# Altium PCB Pec.PcbDoc (part 1 of 2)
Units mm, origin at the board's own origin, x right, y up, seen from the top; angles counter-clockwise.
Board outline 94.11 x 61.04 mm, 2 copper layers (Top Layer, Bottom Layer); 131 components, 81 nets, 370 pads, 218 vias.
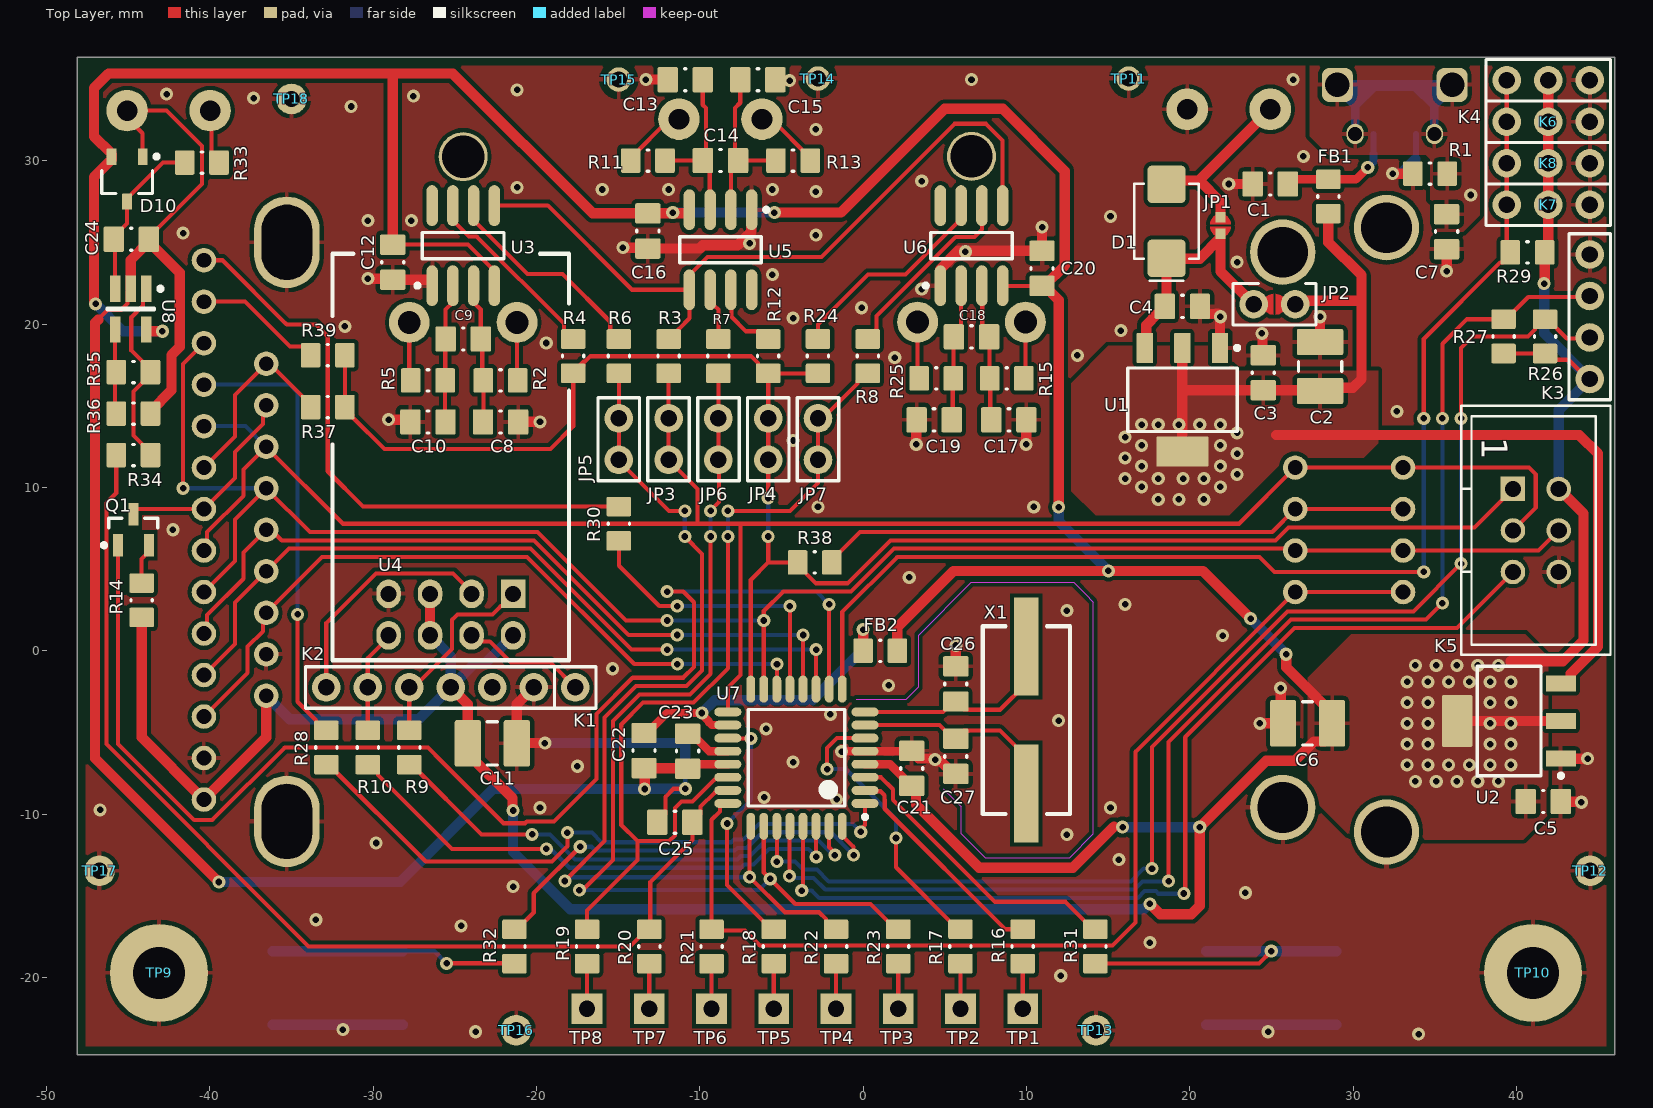
[diagram p0: Top Layer view]
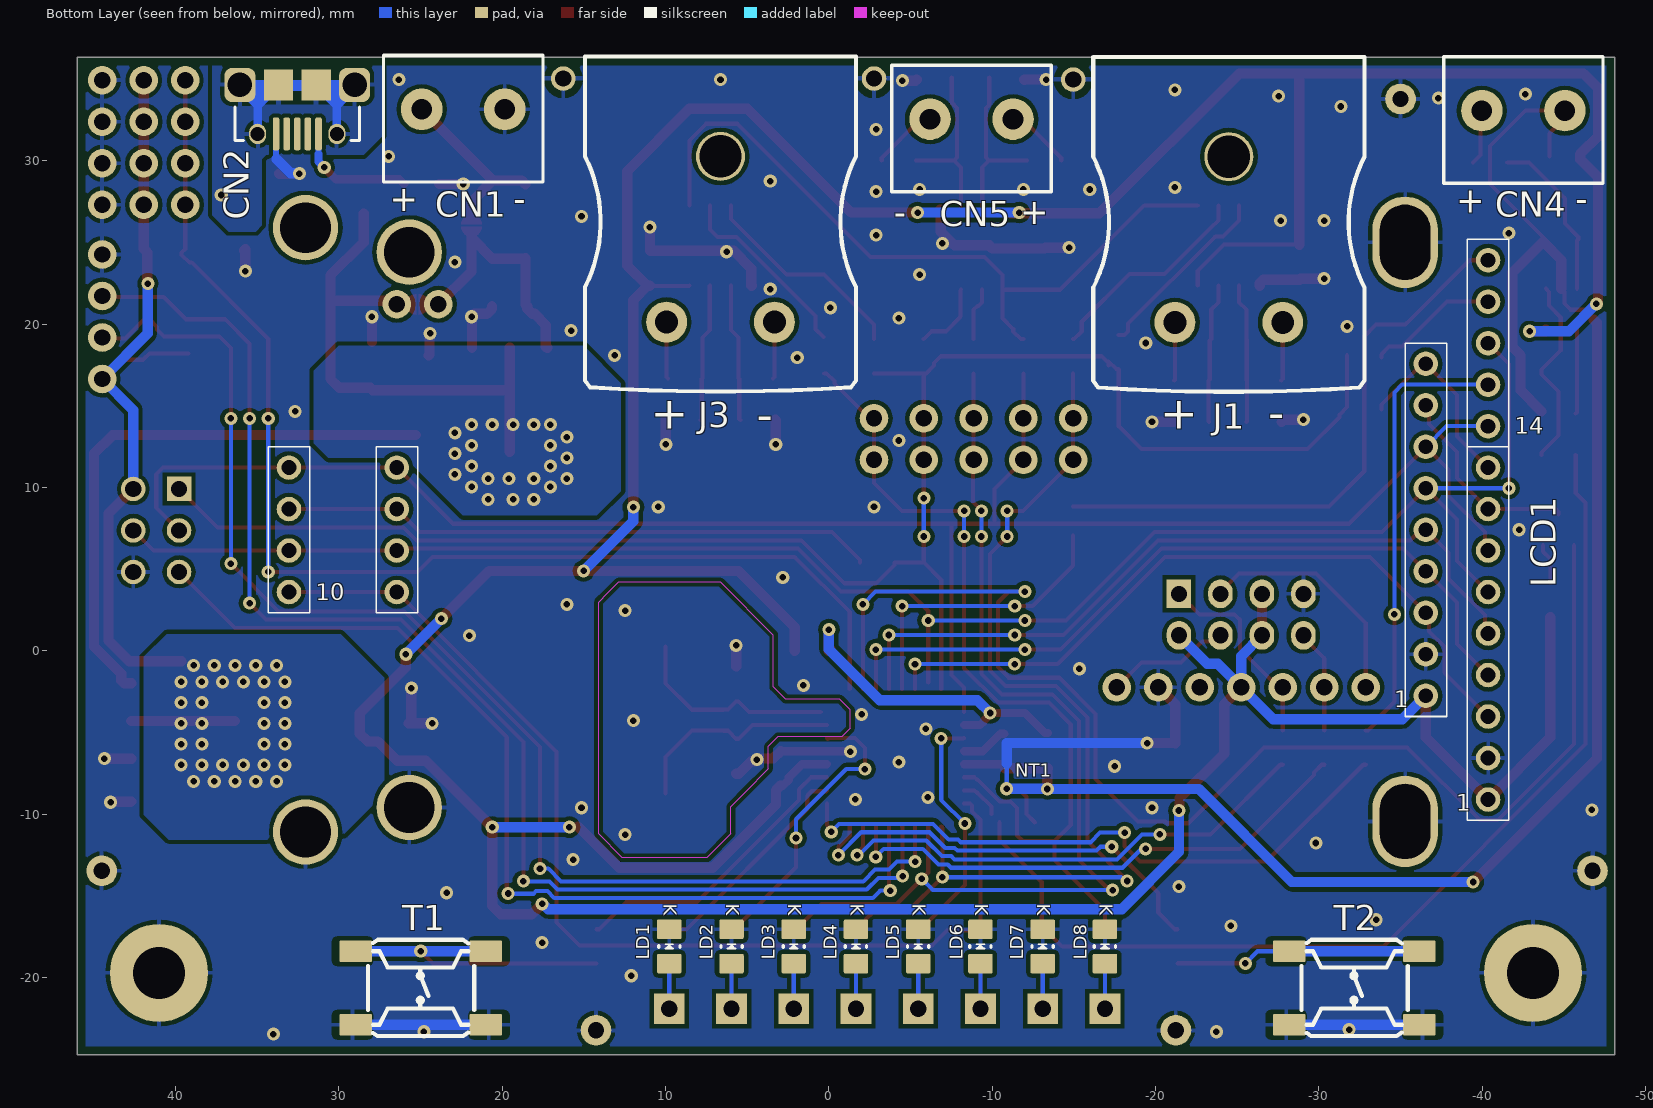
[diagram p1: Bottom Layer view, seen from below]

## Layer stack, top to bottom
Top Solder: solder mask 0.0102, Solder Resist, Dk 3.5
Top Layer: signal copper 0.0356
Dielectric 1: dielectric 0.32, FR-4, Dk 4.8
Bottom Layer: signal copper 0.0356
Bottom Solder: solder mask 0.0102, Solder Resist, Dk 3.5

## Board outline
-48.099,-24.721 -48.099,36.322 46.008,36.322 46.008,-24.721

## Design rules (kind name [scope] priority, off if disabled: settings)
BoardOutlineClearance [All] p1: gap=0.508 ignorepadtopadclearanceinfootprint=FALSE
Clearance Clearance_uUSB [InComponent('CN2') vs InComponent('CN2')] p1: gap=0.203 ignorepadtopadclearanceinfootprint=FALSE
Clearance Clearance_JP1 [InComponent('JP1') vs InComponent('JP1')] p2: gap=0.152 ignorepadtopadclearanceinfootprint=FALSE
Clearance Clearance_JP2 [InComponent('JP2') vs InComponent('JP2')] p3: gap=0.152 ignorepadtopadclearanceinfootprint=FALSE
Clearance [All] p4: gap=0.254 ignorepadtopadclearanceinfootprint=FALSE
ComponentClearance CompClearance_ESPcon [InComponent('K1') vs InComponent('K2')] p1: gap=0 collisioncheckmode=3 verticalgap=0 showdistances=FALSE
ComponentClearance CompClearance_DBcon [InComponent('K4') or InComponent('K6') or InComponent('K7') or InComponent('K8') vs InComponent('K4') or InComponent('K6') or InComponent('K7') or InComponent('K8')] p2: gap=0 collisioncheckmode=3 verticalgap=0 showdistances=FALSE
ComponentClearance CompClearance_PWR [(Identifier = 'User Library-Cliff FC68149 DC PCB Socket') vs InComponent('CN3')] p3: gap=0 collisioncheckmode=3 verticalgap=0 showdistances=FALSE
ComponentClearance [All] p4: gap=0.254 collisioncheckmode=3 verticalgap=0.254 showdistances=FALSE
HoleSize [All] p1: absolutevalues=TRUE maxlimit=6 minlimit=0.025 maxpercent=80.000 minpercent=20.000
HoleToHoleClearance [All] p1: gap=0.203 allowstackedmicrovias=TRUE
MinimumSolderMaskSliver [All] p1: minsoldermaskwidth=0
PolygonConnect [All] p1: thpad.connectstyle=Relief thpad.reliefconductorwidth=0.254 thpad.reliefentries=4 thpad.polygonreliefangle="90 Angle" thpad.airgapwidth=0.254 smdpad.connectstyle=Relief smdpad.reliefconductorwidth=0.254 smdpad.reliefentries=4 smdpad.polygonreliefangle="90 Angle" smdpad.airgapwidth=0.254 via.connectstyle=Direct via.reliefconductorwidth=0.254 via.reliefentries=4 via.polygonreliefangle="90 Angle" via.airgapwidth=0.254
RoutingVias [All] p1: holewidth=0.4 width=0.8 viastyle="Through Hole" minholewidth=0.4 minwidth=0.8 maxholewidth=0.4 maxwidth=0.8
SilkToSilkClearance [All] p1: silktosilkclearance=0.152
SilkToSolderMaskClearance [IsPad] p1: minsilkscreentomaskgap=0.102 clearancetoexposedcopper=TRUE
SolderMaskExpansion [All] p1: expansion=0.102 istentingtop=FALSE
Width [All] p1: maxlimit=1.27 minlimit=0.254 preferedwidth=0.254
24 further rules are at their usual default settings.

## Components (designator, comment, footprint, x,y, rotation, side; value= is the part's Value field where it differs from the comment)
C1 "10n" C2012_0805I_M 24.926,28.575 r180 top
C2 "10u" C3225_1210I_M 27.974,17.399 r90 top
C3 "100n" C2012_0805I_M 24.501,17.018 r90 top
C4 "100n" C2012_0805I_M 19.548,21.082 r0 top
C5 "100n" C2012_0805I_M 41.639,-9.227 r0 top
C6 "10u" C3225_1210I_M 27.212,-4.445 r180 top
C7 "4n7" C2012_0805I_M 35.721,25.654 r90 top
C8 "NP" C2012_0805I_M -22.191,14.007 r180 top
C9 "10n" C2012_0805I_M -24.479,19.087 r180 top
C10 "NP" C2012_0805I_M -26.636,14.007 r180 top
C11 "10u" C3225_1210I_M -22.699,-5.671 r0 top
C12 "100n" C2012_0805I_M -28.795,23.786 r90 top
C13 "NP" C2012_0805I_M -10.888,34.955 r0 top
C14 "10n" C2012_0805I_M -8.729,30.009 r0 top
C15 "NP" C2012_0805I_M -6.443,34.955 r0 top
C16 "100n" C2012_0805I_M -13.174,25.698 r90 top
C17 "NP" C2012_0805I_M 8.924,14.134 r180 top
C18 "10n" C2012_0805I_M 6.638,19.214 r180 top
C19 "NP" C2012_0805I_M 4.352,14.134 r180 top
C20 "100n" C2012_0805I_M 10.956,23.412 r270 top
C21 "100n" C2012_0805I_M 2.98,-7.195 r90 top
C22 "100n" C2012_0805I_M -13.409,-6.107 r270 top
C23 "100n" C2012_0805I_M -10.742,-6.147 r270 top
C24 "10n" C2012_0805I_M -44.797,25.19 r0 top
C25 "10n" C2012_0805I_M -11.523,-10.497 r180 top
C26 "18p" C2012_0805I_M 5.679,-2.029 r90 top
C27 "18p" C2012_0805I_M 5.679,-6.465 r270 top
CN1 "VRSTNA SPONKA 2P/16A" "VRSTNA SPONKA 2P/16A" 24.926,33.147 r180 bottom
CN2 "microUSB" micro-USB-HRS-ZX62D-B-5PA8 32.546,32.639 r90 bottom
CN4 "VRSTNA SPONKA 2P/16A" "VRSTNA SPONKA 2P/16A" -39.971,33.064 r180 bottom
CN5 "VRSTNA SPONKA 2P/16A" "VRSTNA SPONKA 2P/16A" -6.189,32.542 r180 bottom
D1 "SS26" DO-214AA_SMB_M 18.576,26.289 r90 top
D10 "DB3X313F" SOT23 -45.051,28.873 r270 top
FB1 "FERITTE BEAD" R2012_0805I_M 28.482,27.813 r270 top
FB2 "FERITTE BEAD" R2012_0805I_M 1.05,0 r180 top
J1 "IM-K-PCB" IM-x-PCB -24.479,30.244 r180 bottom
J3 "IM-K-PCB" IM-x-PCB 6.638,30.263 r180 bottom
JP1 "JMP" solderJumper 21.878,26.035 r270 top value={Value}
JP2 "JMP" H1x2+solderJumper 26.45,21.209 r0 top value={Value}
JP3 "JMP" H1x2 -11.904,14.224 r90 top value={Value}
JP4 "JMP" H1x2 -5.808,14.224 r90 top value={Value}
JP5 "JMP" H1x2 -14.952,14.224 r90 top value={Value}
JP6 "JMP" H1x2 -8.856,14.224 r90 top value={Value}
JP7 "JMP" H1x2 -2.76,14.224 r90 top value={Value}
K1 "H1x1" H1x1 -17.619,-2.242 r270 top
K2 "H1x6" H1x6 -20.159,-2.242 r0 top
K3 "H1x4" H1x4 44.484,24.257 r90 top
K4 "H1x3" H1x3 39.404,34.925 r180 top
K5 "H2x3" H2X3_SPEEDY 39.785,9.906 r270 top
K6 "H1x3" H1x3 39.404,32.385 r180 top
K7 "H1x3" H1x3 39.404,27.305 r180 top
K8 "H1x3" H1x3 39.404,29.845 r180 top
LCD1 "Color LCD display" LCD_display -3.522,7.403 r0 bottom locked
LD1 "LED" LED2012_0805I_M 9.773,-18.102 r270 bottom
LD2 "LED" LED2012_0805I_M 5.963,-18.102 r270 bottom
LD3 "LED" LED2012_0805I_M 2.153,-18.102 r270 bottom
LD4 "LED" LED2012_0805I_M -1.657,-18.102 r270 bottom
LD5 "LED" LED2012_0805I_M -5.467,-18.102 r270 bottom
LD6 "LED" LED2012_0805I_M -9.277,-18.102 r270 bottom
LD7 "LED" LED2012_0805I_M -13.087,-18.102 r270 bottom
LD8 "LED" LED2012_0805I_M -16.897,-18.102 r270 bottom
NT1 "NetTie" NetTie-10mil -10.888,-7.83 r270 bottom net-tie
Q1 "PMV160UP" NXP-SOT23_N -44.67,7.41 r90 top
R1 "10M" R2012_0805I_M 34.705,29.21 r180 top
R2 "100" R2012_0805I_M -22.191,16.547 r180 top
R3 "10k" R2012_0805I_M -11.904,18.034 r270 top
R4 "10k" R2012_0805I_M -17.746,18.034 r270 top
R5 "100" R2012_0805I_M -26.636,16.547 r0 top
R6 "10k" R2012_0805I_M -14.952,18.034 r270 top
R7 "10k" R2012_0805I_M -8.856,18.034 r270 top
R8 "10k" R2012_0805I_M 0.288,18.034 r270 top
R9 "1k" R2012_0805I_M -27.779,-5.925 r90 top
R10 "1k" R2012_0805I_M -30.319,-5.925 r90 top
R11 "100" R2012_0805I_M -13.174,30.009 r0 top
R12 "10k" R2012_0805I_M -5.808,18.034 r270 top
R13 "100" R2012_0805I_M -4.284,30.009 r180 top
R14 "10" R2012_0805I_M -44.162,3.092 r270 top
R15 "100" R2012_0805I_M 8.797,16.674 r180 top
R16 "330" R2012_0805I_M 9.773,-18.102 r270 top
R17 "330" R2012_0805I_M 5.963,-18.102 r270 top
R18 "330" R2012_0805I_M -5.467,-18.102 r270 top
R19 "330" R2012_0805I_M -16.897,-18.102 r270 top
R20 "330" R2012_0805I_M -13.087,-18.102 r270 top
R21 "330" R2012_0805I_M -9.277,-18.102 r270 top
R22 "330" R2012_0805I_M -1.657,-18.102 r270 top
R23 "330" R2012_0805I_M 2.153,-18.102 r270 top
R24 "10k" R2012_0805I_M -2.76,18.034 r270 top
R25 "100" R2012_0805I_M 4.479,16.674 r0 top
R26 "10k" R2012_0805I_M 41.747,19.248 r270 top
R27 "10k" R2012_0805I_M 39.207,19.248 r270 top
R28 "1k" R2012_0805I_M -32.859,-5.925 r90 top
R29 "4k7" R2012_0805I_M 40.674,24.384 r0 top
R30 "4k7" R2012_0805I_M -14.952,7.777 r90 top
R31 "1k" R2012_0805I_M 14.218,-18.102 r90 top
R32 "1k" R2012_0805I_M -21.342,-18.102 r270 top
R33 "10k" R2012_0805I_M -40.479,29.889 r180 top
R34 "10k" R2012_0805I_M -44.67,11.982 r180 top
R35 "100k" R2012_0805I_M -44.67,17.062 r0 top
R36 "10k" R2012_0805I_M -44.67,14.522 r180 top
R37 "1k" R2012_0805I_M -32.772,14.918 r180 top
R38 "1k" R2012_0805I_M -2.957,5.405 r0 top
R39 "1k" R2012_0805I_M -32.772,18.093 r180 top
T1 "Tipka_6x6" "Tipka 6x6" 25.013,-20.642 r270 bottom (schematic designator A1)
T2 "Tipka_6x6" "Tipka 6x6" -32.137,-20.642 r270 bottom (schematic designator A2)
TP1 "PAD" PAD_HOLE 9.773,-21.912 r90 top
TP2 "PAD" PAD_HOLE 5.963,-21.912 r90 top
TP3 "PAD" PAD_HOLE 2.153,-21.912 r90 top
TP4 "PAD" PAD_HOLE -1.657,-21.912 r90 top
TP5 "PAD" PAD_HOLE -5.467,-21.912 r90 top
TP6 "PAD" PAD_HOLE -9.277,-21.912 r90 top
TP7 "PAD" PAD_HOLE -13.087,-21.912 r90 top
TP8 "PAD" PAD_HOLE -16.897,-21.912 r90 top
TP9 "PAD" PAD_CIRC_HOLE#1 -43.099,-19.721 r90 top
TP10 "PAD" PAD_CIRC_HOLE#1 41.008,-19.721 r90 top
TP11 "PAD" PAD_CIRC_HOLE#2 16.258,35.029 r90 top
TP12 "PAD" PAD_CIRC_HOLE#3 44.508,-13.471 r90 top
TP13 "PAD" PAD_CIRC_HOLE#3 14.258,-23.221 r90 top
TP14 "PAD" PAD_CIRC_HOLE#2 -2.76,35.029 r90 top
TP15 "PAD" PAD_CIRC_HOLE#2 -14.952,34.969 r90 top
TP16 "PAD" PAD_CIRC_HOLE#3 -21.242,-23.221 r90 top
TP17 "PAD" PAD_CIRC_HOLE#3 -46.742,-13.471 r90 top
TP18 "PAD" PAD_CIRC_HOLE#3 -34.992,33.779 r90 top
U1 "REG1117-5" TI-DCY4_N 19.548,15.367 r270 top
U2 "REG1117-3.3" TI-DCY4_N 39.543,-4.3 r180 top
U3 "MAX31855KASA+" MAXM-S8+4_M -24.479,24.802 r90 top
U4 "ESP-01" ESP01 -21.429,3.48 r270 top
U5 "MAX31855KASA+" MAXM-S8+4_M -8.729,24.548 r270 top
U6 "MAX31855KASA+" MAXM-S8+4_M 6.638,24.802 r90 top
U7 "ATmega328PB-AU" 32A_N -4.079,-6.547 r180 top
U8 "LT6003CS5" LT-S5-5-TSOT-23_M -44.84,20.911 r270 top
X1 "16MHz" Crystal_HC49 9.997,0.253 r270 top

## Footprints (in the part's own frame and the unit in brackets; to place one, negate y for a bottom-side part, rotate by r counter-clockwise, add the part's x,y. Pads: shape width x height; smd on the part's side, far side on the other; paste and mask are expansions set on the pad)
32A_N [mm]
  oval 1.65x0.54 smd mask+0.08: 1(-4.2,2.8) 2(-4.2,2) 3(-4.2,1.2) 4(-4.2,0.4) 5(-4.2,-0.4) 6(-4.2,-1.2) 7(-4.2,-2) 8(-4.2,-2.8) 17(4.2,-2.8) 18(4.2,-2) 19(4.2,-1.2) 20(4.2,-0.4) 21(4.2,0.4) 22(4.2,1.2) 23(4.2,2) 24(4.2,2.8)
  oval 0.54x1.65 smd mask+0.08: 9(-2.8,-4.2) 10(-2,-4.2) 11(-1.2,-4.2) 12(-0.4,-4.2) 13(0.4,-4.2) 14(1.2,-4.2) 15(2,-4.2) 16(2.8,-4.2) 25(2.8,4.2) 26(2,4.2) 27(1.2,4.2) 28(0.4,4.2) 29(-0.4,4.2) 30(-1.2,4.2) 31(-2,4.2) 32(-2.8,4.2)
  silkscreen extent -4.33,-2.95 2.95,3.75, body extent -3.5,-3.5 3.5,3.5, height 1.2
C2012_0805I_M [mm] "Chip Capacitor, 2-Leads, Body 2.05x1.25mm, IPC Low Density"
  rrect15% 1.25x1.55 smd: 1(-1.075,0) 2(1.075,0)
  silkscreen extent -0.05,-0.67 0.05,0.67, body extent -1.1,-0.7 1.1,0.7, height 1.4
C3225_1210I_M [mm] "Chip Capacitor, 2-Leads, Body 3.20x2.50mm, IPC Low Density"
  rrect15% 1.6x2.85 smd: 1(-1.5,0) 2(1.5,0)
  silkscreen extent -0.3,-1.32 0.3,1.33, body extent -1.75,-1.38 1.75,1.38, height 2.8
Crystal_HC49 [mm] "Crystall SMD short HC49"
  rect 6x1.5 smd: 1(0,0) 2(8.999,0)
  silkscreen extent -1.25,-2.67 10.25,2.67, body extent -2.13,-2.41 11.27,2.49, height 5.08
DO-214AA_SMB_M [mm] "Diode, Molded Body; 5.40 mm L X 3.62 mm W X 2.44 mm H body"
  rrect22% 2.28x2.32 smd: A(2.265,0) C(-2.265,0)
  silkscreen extent -3.63,-1.97 2.29,1.97, body extent -2.7,-1.81 2.7,1.81, height 2.44
ESP01 [mm]
  rect 1.75x1.5 hole 1: 1(0,0)
  oval 1.75x1.5 hole 1: 2(2.54,0) 3(0,-2.54) 4(2.54,-2.54) 5(0,-5.08) 6(2.54,-5.08) 7(0,-7.62) 8(2.54,-7.62)
  silkscreen extent -20.83,-11.05 4.06,3.43, body extent -20.76,-11.06 4.04,3.44, height 11.69
H1x1 [mm]
  round 1.75 hole 1: 1(0,0)
  silkscreen extent -1.27,-1.27 1.27,1.27, body extent -1.27,-1.27 1.27,1.27, height 8.4
H1x2 [mm]
  round 1.75 hole 1: 1(0,0) 2(-2.54,0)
  silkscreen extent -3.81,-1.27 1.27,1.27, body extent -3.81,-1.27 1.27,1.27, height 8.4
H1x2+solderJumper [mm]
  round 1.75 hole 1: 1(0,0) 2(-2.54,0)
  Top Layer region: 0.381,0.635 -0.508,0.635 -0.762,0.381 -0.762,-0.381 -0.508,-0.635 0.381,-0.635 0.635,-0.381 0.635,0.381
  Top Layer region: -2.921,0.635 -2.032,0.635 -1.778,0.381 -1.778,-0.381 -2.032,-0.635 -2.921,-0.635 -3.175,-0.381 -3.175,0.381
  Top Layer region: -1.194,0.635 -0.882,0.546 -0.654,0.314 -0.571,0 -0.571,0 -0.654,-0.314 -0.882,-0.546 -1.194,-0.635 -1.194,-0.635
  Top Layer region: -1.346,0.635 -1.658,0.546 -1.886,0.314 -1.969,0 -1.969,0 -1.886,-0.314 -1.658,-0.546 -1.346,-0.635 -1.346,-0.635
  silkscreen extent -3.81,-1.27 1.27,1.27, body extent -3.81,-1.27 1.27,1.27, height 8.4
H1x3 [mm]
  round 1.75 hole 1: 1(0,0) 2(-2.54,0) 3(-5.08,0)
  silkscreen extent -6.35,-1.27 1.27,1.27, body extent -6.35,-1.27 1.27,1.27, height 8.4
H1x4 [mm]
  round 1.75 hole 1: 1(0,0) 2(-2.54,0) 3(-5.08,0) 4(-7.62,0)
  silkscreen extent -8.89,-1.27 1.27,1.27, body extent -8.89,-1.27 1.27,1.27, height 8.4
H1x6 [mm]
  round 1.75 hole 1: 1(0,0) 2(-2.54,0) 3(-5.08,0) 4(-7.62,0) 5(-10.16,0) 6(-12.7,0)
  silkscreen extent -13.97,-1.27 1.27,1.27, body extent -13.97,-1.27 1.27,1.27, height 8.4
H2X3_SPEEDY [mm]
  rect 1.5x1.5 hole 1: 1(0,0)
  round 1.5 hole 1: 2(0,2.794) 3(2.54,0) 4(2.54,2.794) 5(5.08,0) 6(5.08,2.794)
  silkscreen extent -5.08,-3.18 10.16,5.97, body extent -5.08,-3.18 10.16,6.03, height 9.45
IM-x-PCB [mm]
  round 3 hole 2.6: 0(0,0)
  round 2.5 hole 1.4: 1(-3.3,-10.141) 2(3.3,-10.141)
  silkscreen extent -8.3,-14.39 8.3,6.11, body extent -8.3,-14.39 8.3,6.11, height 8.57
LCD_display [mm]
  round 4 hole 3.1: 0(29.21,-17) 0(35.56,-18.5) M0(29.21,17) M0(35.56,18.5)
  round 1.5 hole 0.9: 1(-36.83,16.51) 1(-33.02,10.16) 2(-36.83,13.97) 2(-33.02,7.62) 3(-36.83,11.43) 3(-33.02,5.08) 4(-36.83,8.89) 4(-33.02,2.54) 5(-36.83,6.35) 5(-33.02,0) 6(-36.83,3.81) 6(-33.02,-2.54) 7(-36.83,1.27) 7(-33.02,-5.08) 8(-36.83,-1.27) 8(-33.02,-7.62) 9(-36.83,-3.81) 9(-33.02,-10.16) 10(29.972,3.81) 10(36.576,3.81) 11(29.972,1.27) 11(36.576,1.27) 12(29.972,-1.27) 12(36.576,-1.27) 13(29.972,-3.81) 13(36.576,-3.81) 14(-36.83,-6.35) 15(-36.83,-8.89) 16(-36.83,-11.43) 17(-36.83,-13.97) 18(-36.83,-16.51)
  oval 4x5.6 hole 3.1 slot 4.6 at 90 deg: M0(-31.75,-17.6) M0(-31.75,17.85)
  silkscreen extent -38.1,-17.78 37.85,17.78, body extent -33.75,-20 33.25,20, height 17.1
LED2012_0805I_M [mm] "SMD LED, 2-Leads, Body 2.05x1.25mm, IPC Low Density"
  rrect15% 1.2x1.5 smd: 1(-1.05,0) 2(1.05,0)
  silkscreen extent -0.13,-0.65 0.13,0.65, body extent -1,-0.62 1,0.63, height 0.7
LT-S5-5-TSOT-23_M [mm] "SOT23, 5-Leads, Body 2.90x1.63mm, Pitch 0.95mm, IPC Low Density"
  rect 1.6x0.65 smd: 1(-1.25,0.95) 2(-1.25,0) 3(-1.25,-0.95) 4(1.25,-0.95) 5(1.25,0.95)
  silkscreen extent -1.37,-1.45 0.05,1.95, body extent -0.87,-1.45 0.87,1.45, height 1
MAXM-S8+4_M [mm] "SOIC, 8-Leads, Body 4.9x3.9mm, Pitch 1.27mm, IPC Low Density"
  oval 2.5x0.7 smd: 1(-2.45,1.905) 2(-2.45,0.635) 3(-2.45,-0.635) 4(-2.45,-1.905) 5(2.45,-1.905) 6(2.45,-0.635) 7(2.45,0.635) 8(2.45,1.905)
  silkscreen extent -2.57,-2.5 0.8,2.93, body extent -2,-2.5 2,2.5, height 1.75
micro-USB-HRS-ZX62D-B-5PA8 [mm]
  rrect100% 1.25x1.05 hole 0.85: 0(-1,-2.425) 0(-1,2.425)
  rrect50% 2.1x1.9 hole 1.5: 0(2,-3.512) 0(2,3.512)
  rect 1.9x1.8 smd: 0(2,-1.15) 0(2,1.15)
  rrect50% 2x0.4 smd: 1(-1,-1.3) 2(-1,-0.65) 3(-1,0) 4(-1,0.65) 5(-1,1.3)
  Top Layer region: -1.016,-2.159 0.635,-2.159 1.651,-1.143 1.651,1.143 0.635,2.159 -1.016,2.159 -1.016,2.667 0.635,2.667 1.524,3.556 2.286,3.556 2.286,-3.556 1.524,-3.556 0.635,-2.667 -1.016,-2.667
  silkscreen extent -1.4,-3.81 0.64,3.81, body extent -1.11,-4.1 4.32,4.1, height 2.68
NetTie-10mil [mil]
  round 0.1 smd paste-39.37 mask+0: 1(-10,0) 2(10,0)
  Top Layer lines w10: 10,0 -10,0
NXP-SOT23_N [mm]
  rect 1.4x0.6 smd: 1(-0.95,0.95) 2(-0.95,-0.95) 3(0.95,0)
  silkscreen extent -1.07,-1.5 0.7,1.92, body extent -0.7,-1.5 0.7,1.5, height 1.1
PAD_CIRC_HOLE#1 [mm]
  round 6 hole 3.2: 1(0,0)
PAD_CIRC_HOLE#2 [mm]
  round 1.5 hole 1.001: 1(0,0)
PAD_CIRC_HOLE#3 [mm]
  round 1.88 hole 1.001: 1(0,0)
PAD_HOLE [mil]
  rect 74x74 hole 39.4: 1(0,0)
R2012_0805I_M [mm] "Chip Resistor, 2-Leads, Body 2.05x1.25mm, IPC Low Density"
  rrect15% 1.2x1.5 smd: 1(-1.05,0) 2(1.05,0)
  silkscreen extent -0.05,-0.65 0.05,0.65, body extent -1.1,-0.7 1.1,0.7, height 0.8
solderJumper [mil]
  rect 25x25 smd: 1(20,0) 2(-20,0)
  Top Layer region: 3,25 15.29,21.49 24.24,12.36 27.51,0 27.51,0 24.24,-12.36 15.29,-21.49 3,-25 3,-25
  Top Layer region: -3,25 -15.29,21.49 -24.24,12.36 -27.51,0 -27.51,0 -24.24,-12.36 -15.29,-21.49 -3,-25 -3,-25
SOT23 [mm]
  rrect10% 1x0.6 smd: 1(-1.375,0.95) 2(-1.375,-0.95) 3(1.375,0)
  silkscreen extent -1.5,-1.55 0.87,1.92, body extent -1.25,-1.5 1.25,1.5, height 1.05
TI-DCY4_N [mm]
  rrect10% 1.85x1 smd: 1(-3.175,2.3) 2(-3.175,0) 3(-3.175,-2.3)
  rrect10% 1.85x3.2 smd: 4(3.175,0)
  silkscreen extent -3.3,-3.35 1.95,3.48, body extent -1.85,-3.35 1.85,3.35, height 1.8
"Tipka 6x6" [mm]
  rrect10% 1.3x2 smd: 1(-2.25,-3.95) 2(-2.25,4) 3(2.25,-3.95) 4(2.25,4)
  silkscreen extent -2.95,-3.2 2.95,3.3, body extent -2.95,-4.07 3.05,4.08, height 5
"VRSTNA SPONKA 2P/16A" [mm]
  round 2.54 hole 1.27: 1(0,0) 2(5.08,0)
  silkscreen extent -2.34,-4.45 7.42,3.3, body extent -2.46,-4.57 7.54,3.43, height 10.01

## Part data
C1 C2 C3 C4 C5 C6 C7 C8 C9 C10 C11 C12 C13 C14 C15 C16 C17 C18 C19 C20 C21 C22 C23 C24 C25 C26 C27: library part C, "Capacitor"
CN2: library part "microUSB-B-socket (HIROSE ZX62D-B-5PA8)", "micro USB-B socket (HIROSE ZX62D-B-5PA8)", Supplier Part Number 1=2300438, ComponentLink1Description=http://www.farnell.com/datasheets/1693470.pdf, ComponentLink1URL=http://www.farnell.com/datasheets/1693470.pdf, Supplier 1=Farnell
D1: library part P6SMB6.8AT3, "P6SMB6.8AT3"
D10: "Schottky", Supplier Part Number 1=2459056, Supplier 1=Farnell
K1: "Header 1x1 (male)"
K2: "Header 1x6 (male)"
K3: "Header 1x4 (male)"
K4 K6 K7 K8: "Header 1x3 (male)"
K5: "Header 2x3 (male)"
LCD1: library part LCD_module, "2.2\" or 2.4\" LCD_module w/o Touch"
NT1: "Connetct different grounds together"
Q1: library part PMV160UP,215, "P-Channel Trench MOSFET, -20 V, -1.2 A, -55 to 150 degC, 3-Pin SOT23, Tape and Reel", Manufacturer="NXP Semiconductors", Supplier Part Number 1=568-10320-2-ND, Channel Type=P, Ciss [typ] (pF)=365, Code_JEDEC=TO-236AB, ComponentLink1Description="Manufacturer URL", ComponentLink1URL=http://www.nxp.com/, ComponentLink2Description=Datasheet, ComponentLink2URL=http://www.nxp.com/documents/data_sheet/PMV160UP.pdf, ComponentLink3Description="Package Specification", ComponentLink3URL=http://www.nxp.com/documents/outline_drawing/sot023_po.pdf, Coss [typ] (pF)=42, DatasheetVersion="Rev. 2", ID [max] (A)=-1.2, Mounting Technology="Surface Mount", PackageDescription="3-Pin Small Outline Transistor Package, Body 2.9 x 1.3 mm, Pitch 0.95 mm", PackageReference=SOT23, PackageVersion="06-03-16, 03/2006", Packing="Tape & Reel", PartNumber=PMV160UP,215, Supplier 1=Digi-Key, Supplier 2=Digi-Key, Supplier 3=Digi-Key, Supplier 4=Newark, Supplier 5=Mouser, Supplier Part Number 2=568-10320-1-ND, Supplier Part Number 3=568-10320-6-ND, Supplier Part Number 4=54T9404, Supplier Part Number 5=771-PMV160UP215, VDS [max] (V)=-20, VGSth [typ] (V)=-0.7
R1 R2 R3 R4 R5 R6 R7 R8 R9 R10 R11 R12 R13 R14 R15 R16 R17 R18 R19 R20 R21 R22 R23 R24 R25 R26 R27 R28 R29 R30 R31 R32 R33 R34 R35 R36 R37 R38 R39: library part R, "R"
T1 T2: "tactile switch SMD"
U1: "Single Output LDO, 800 mA, Fixed 5 V Output, 3.8 to 15 V Input, with Internal Current Limiting, 4-pin SOT-223 (DCY), -40 to 125 degC, Green (RoHS & no Sb/Br)", Manufacturer="Texas Instruments", Rating=Catalog, Supplier Part Number 1=REG1117-5-ND, Code_JEDEC=TO-261, ComponentLink1Description="Manufacturer URL", ComponentLink1URL=http://www.ti.com/, ComponentLink2Description=Datasheet, ComponentLink2URL=http://www.ti.com/general/docs/lit/getliterature.tsp?genericPartNumber=REG1117-5&fileType=pdf, ComponentLink3Description="Package Specification", ComponentLink3URL=http://www.ti.com/litv/pdf/mpds094a, DatasheetVersion=SBVS001D, Eco-Plan="Green (RoHS & no Sb/Br)", Iout(Max)(A)=0.8, Iq(Typ)(mA)=4, Mounting Technology="Surface Mount", PackageDescription="4-Pin Plastic Small Outline, Body 3.5 x 6.5 mm, Pitch 2.3 mm", PackageReference=DCY4, PackageVersion=4202506/B, PartNumber=REG1117-5, SubFamily="Single Channel LDO", Supplier 1=Digi-Key, Supplier 2=Farnell, Supplier 3=Farnell, Supplier 4=Newark, Supplier 5=Mouser, Supplier Part Number 2=1212858, Supplier Part Number 3=1212858RL, Supplier Part Number 4=20M1510, Supplier Part Number 5=595-REG1117-5, Vdo(Typ)(mV)=1100, Vin(Max)(V)=15, Vin(Min)(V)=3.8, Vout Adj(Max)(V)=5, Vout Adj(Min)(V)=5
U2: "Single Output LDO, 800 mA, Fixed 3.3 V Output, 3.8 to 15 V Input, with Internal Current Limiting, 4-pin SOT-223 (DCY), -40 to 125 degC, Green (RoHS & no Sb/Br)", Manufacturer="Texas Instruments", Rating=Catalog, Supplier Part Number 1=REG1117-3.3-ND, Code_JEDEC=TO-261, ComponentLink1Description="Manufacturer URL", ComponentLink1URL=http://www.ti.com/, ComponentLink2Description=Datasheet, ComponentLink2URL=http://www.ti.com/general/docs/lit/getliterature.tsp?genericPartNumber=REG1117-33&fileType=pdf, ComponentLink3Description="Package Specification", ComponentLink3URL=http://www.ti.com/litv/pdf/mpds094a, DatasheetVersion=SBVS001D, Eco-Plan="Green (RoHS & no Sb/Br)", Fixed Output Options(V)=5, Iout(Max)(A)=0.8, Iq(Typ)(mA)=4, Mounting Technology="Surface Mount", PackageDescription="4-Pin Plastic Small Outline, Body 3.5 x 6.5 mm, Pitch 2.3 mm", PackageReference=DCY4, PackageVersion=4202506/B, PartNumber=REG1117-3.3, SubFamily="Single Channel LDO", Supplier 1=Digi-Key, Supplier 2=Farnell, Supplier 3=Farnell, Supplier 4=Newark, Supplier 5=Mouser, Supplier Part Number 2=1212355, Supplier Part Number 3=2126471, Supplier Part Number 4=35C1963, Supplier Part Number 5=595-REG1117-3.3, Vdo(Typ)(mV)=1100, Vin(Max)(V)=15, Vin(Min)(V)=3.8, Vout Adj(Max)(V)=3.3, Vout Adj(Min)(V)=3.3
U3 U5 U6: "Cold Junction Compensated Thermocouple to Digital Converter, 14 Bits Temperature Resolution, -40 to 125 degC, 8-Pin SOIC (S8+4), Pb-Free", Generic Part Number=MAX31855, Supplier Part Number 1=MAX31855KASA+-ND, Code_JEDEC=MS-012, ComponentLink1Description="Manufacturer URL", ComponentLink1URL=http://www.maximintegrated.com/, ComponentLink2Description=Datasheet, ComponentLink2URL=http://datasheets.maximintegrated.com/en/ds/MAX31855.pdf, ComponentLink3Description="Package Specification", ComponentLink3URL=http://pdfserv.maximintegrated.com/package_dwgs/21-0041.PDF, DatasheetVersion="Rev. 2", Functions="Thermocouple-to-Digital Converter", Interface=SPI, Mounting Technology="Surface Mount", PackageDescription="8-Pin Small-Outline IC, Narrow, Body 3.9 x 4.9 mm, Pitch 1.27 mm", PackageReference=S8+4, PackageVersion="Rev. D, 10/2012", Parasite Pwr.=No, PartNumber=MAX31855KASA+, Supplier 1=Digi-Key, Supplier 2=Mouser, Supplier Part Number 2=700-MAX31855KASA+
U7: "8-bit AVR Microcontroller, 32KB Flash, 1KB EEPROM, 2KB SRAM, 32-pin TQFP, Industrial Grade (-40°C to 85°C)", Code_JEDEC=MS-026-ABA, ComponentLink1Description="Manufacturer URL", ComponentLink1URL=http://www.atmel.com/, ComponentLink2Description="ATmega328PB Datasheet", ComponentLink2URL=http://www.atmel.com/Images/Atmel-42397-8-bit-AVR-Microcontroller-ATmega328PB_Datasheet.pdf, ComponentLink3Description="ATmega328P Summary", ComponentLink3URL=http://www.atmel.com/Images/Atmel-42397-8-bit-AVR-Microcontroller-ATmega328PB_Summary.pdf, DatasheetVersion="revC, Oct-2015", PackageDescription="32-Lead, 7x7x1.0 mm Body, 0.8mm Lead Pitch, Thin Profile Plastic Quad Flat Package (TQFP)", PackageReference=32A
U8: "Single Channel, Precision Operational Amplifier, RRIO, 0.002 MHz Typical GBW, 0.0008 V/us Typical SR, 1.6 to 16 V, 5-Pin SOT23 (S5-5), Commercial", Linear Technology Part Number=LT6003, Manufacturer="Linear Technology", Channels (#)=1, Code_JEDEC=MO-193, ComponentLink1Description="Manufacturer URL", ComponentLink1URL=http://www.linear.com/, ComponentLink2Description=Datasheet, ComponentLink2URL=http://cds.linear.com/docs/en/datasheet/600345fd.pdf, ComponentLink3Description="Package Specification", ComponentLink3URL=http://cds.linear.com/docs/en/packaging/SOT_5_05-08-1635.pdf, DatasheetVersion="Rev. D", GBW (MHz) Typical=0.002, Is (mA) Typical=0.00085, Mounting Technology="Surface Mount", PackageDescription="5-Lead Plastic TSOT-23, Body 1.63 x 2.90 mm, Pitch 0.95 mm", PackageReference=LT-S5-5-TSOT-23, PartNumber=LT6003CS5, SR (V/us) Typical=0.0008, Type=VFB, Vos (mV) Guaranteed=0.5, Vos (mV) Typical=0.175, Vs Max (V)=16, Vs Min (V)=1.6
X1: library part Crystal, "Crystal"

## Via types
v1: diameter 0.8, hole 0.4, Top Layer to Bottom Layer, tented both sides, 218 vias

## Nets (pads, with @x,y where several pads share a name; then routed paths per layer and width w, separated by ;. In a path a pad name is that pad's centre, name@x,y a point inside that pad or via, vN(x,y) a via of type N, cw(c..) or ccw(c..) an arc to the next point about the centre after c; other vN are vias at no path point)
+5: C2.1 C3.1 FB1.2 JP2.1 U1.2 U1.4 U2.3 | length 68.2
  Top Layer w0.635: U1.4 19.548,15.875 ; U1.2 19.548,15.875 ; 25.283,13.208 43.849,13.208 44.992,12.065 44.992,0.274 43.326,-1.392 43.326,-1.817 43.143,-2 U2.3 ; JP2.1 26.659,21.419 30.469,21.419 30.514,21.463 ; FB1.2 28.482,25.019 30.514,22.987 30.514,21.463 ; 19.548,15.875 19.616,15.943 C3.1 27.93,15.943 28.09,16.103 29.98,16.103 30.514,16.637 30.514,21.463
  other v1: 18.068,9.271 19.338,9.271 20.862,9.271 17.052,10.033 21.878,10.033 16.036,10.541 18.068,10.541 19.592,10.541 20.862,10.541 22.894,10.795 17.052,11.303 21.878,11.303 16.036,11.811 22.894,12.065 17.052,12.573 21.878,12.573 16.036,13.081 22.894,13.335 17.052,13.843 18.068,13.843 19.338,13.843 20.608,13.843 21.878,13.843
AGND: C22.2 C23.2 C24.2 C25.2 CN4.2 D10.1 NT1.2 R36.1 U7.21 U8.2 | length 112.8
  Top Layer w0.254: -46.829,20.286 -46.243,20.872 -45.415,20.872 -45.038,21.249 -45.038,21.963 U8.2 ; D10.1 -44.101,31.679 -45.051,32.629 CN4.2 -42.638,33.064 -40.479,30.905 -40.479,28.583 -43.722,25.34 C24.2 C24.2@-43.722,25.04 ; R36.1 R36.1@-43.62,14.672 ; C22.2 C22.2@-13.369,-7.221 ; C25.2 -12.1,-9.999 -12.1,-8.94 -11.606,-8.446 v1(-10.882,-8.446) ; C23.2@-10.782,-7.182 C23.2 C23.2@-10.467,-6.947
  Top Layer w0.508: C23.2@-10.467,-6.947 U7.21 U7.21@-8.272,-6.941
  Top Layer w0.635: -46.829,20.265 -47.02,20.074 -47.02,-6.573 v1(-39.438,-14.155) ; U8.2 -44.84,23.922 -43.722,25.04 -41.83,23.148 -41.83,18.608 -42.338,18.1 -42.338,15.954 R36.1@-43.62,14.672 ; C22.2 C23.2@-10.782,-7.182 ; v1(-13.369,-8.461) C22.2@-13.369,-7.221
  Bottom Layer w0.254: v1(-13.369,-8.461) v1@-13.362,-8.454 ; v1@-10.89,-8.454 v1(-10.882,-8.446) v1@-10.888,-8.44
  Bottom Layer w0.635: v1(-39.438,-14.155) -28.338,-14.155 -22.644,-8.461 v1(-13.369,-8.461) ; v1@-13.362,-8.454 v1@-10.89,-8.454
AVCC: C22.1 FB2.2 U7.18 | length 20
  Top Layer w0.508: C22.1 -13.223,-5.032 -12,-3.81 v1@-9.94,-3.81 ; v1@-9.906,-3.844 -9.459,-4.292 -9.459,-4.35 -9.262,-4.547 U7.18
  Top Layer w0.635: FB2.2 -0.092,0.092 0,0.184 v1(0,1.3)
  Bottom Layer w0.635: v1(-9.872,-3.81) -9.083,-3.021 -3.121,-3.021 0,0.1 v1(0,1.3)
BACKLIGHT: LCD1.8 Q1.3 | length 12.5
  Top Layer w0.254: Q1.3 -44.67,8.5 -44.497,8.673 -40.352,8.673 -38.447,10.578 -38.447,12.177 -36.732,13.892 -36.732,14.833 LCD1.8@-36.542,15.023
CS_T: LCD1.15 R28.2 | length 27.4
  Top Layer w0.254: v1(-34.616,2.225) -34.616,-3.118 -33.482,-4.252 -33.482,-4.402 -33.009,-4.875 R28.2
  Bottom Layer w0.254: LCD1.15@-40.345,16.3 LCD1.15 -35.095,16.293 -34.616,15.814 v1(-34.616,2.225)
DTR: K2.6 U4.3 | length 14.7
  Top Layer w0.254: K2.6 -32.859,1.695 -29.815,4.739 -25.103,4.739 -23.969,3.605 U4.3
ESP_RX: K2.4 R9.2 U4.1 | length 12.5
  Top Layer w0.254: R9.2 K2.4 -27.525,-2.242 -25.165,0.118 -25.165,1.896 -24.836,2.224 -22.685,2.224 -22.177,2.732 -22.052,2.732 -21.429,3.355 U4.1
ESP_TX: K2.5 R10.2 U4.8 | length 6.3
  Top Layer w0.254: R10.2 K2.5 -30.319,-0.455 -29.049,0.815 U4.8
GND: C1.2 C2.2 C3.2 C4.2 C5.2 C6.2 C7.1 C8.1 C10.2 C11.2 C12.1 C13.1 C15.2 C16.1 C17.1 C19.2 C20.1 C21.2 C26.2 C27.2 CN1.2 CN2.5 K2.1 K3.1 K4.3 K5.6 K6.3 K7.3 K8.3 LCD1.2 LCD1.M0 LD1.1 LD2.1 LD3.1 LD4.1 LD5.1 LD6.1 LD7.1 LD8.1 NT1.1 R1.2 T1.3 T1.4 T2.3 T2.4 TP9.1 TP10.1 TP11.1 TP12.1 TP13.1 TP14.1 TP15.1 TP16.1 TP17.1 TP18.1 U1.1 U2.1 U3.1 U4.7 U5.1 U6.1 U7.5 | length 92.3
  Top Layer w0.508: v1(-1.317,-6.176) -1.294,-6.153 0.115,-6.153 U7.5 C21.2@2.953,-6.147
  Top Layer w0.635: v1(-30.319,22.777) -28.861,22.777 C12.1 -26.59,22.711 -26.384,22.505 U3.1 ; v1(-29.049,14.153) -27.857,14.153 C10.2 ; C8.1 -21.109,14.014 v1(-19.778,14.014) ; K2.1 -21.199,-3.282 C11.2 -21.177,-5.649 v1(-19.478,-5.649) ; v1(-14.698,24.682) -13.233,24.682 C16.1 -9.997,24.623 -9.806,24.814 -7.684,24.814 -6.836,25.661 -6.836,26.986 U5.1 ; v1(-13.301,34.969) -11.977,34.969 C13.1 ; C15.2 -5.354,34.969 -5.285,34.9 v1(-4.5,34.9) ; C21.2@2.953,-6.147 3.398,-6.592 4.341,-6.592 v1(4.409,-6.66) 4.514,-6.764 4.754,-6.764 5.529,-7.54 C27.2 ; v1(3.255,12.639) 3.266,12.65 3.266,14.123 C19.2 ; U6.1 4.745,22.364 4.745,23.4 5.833,24.487 C20.1 v1(10.956,25.938) ; C26.2 v1(5.679,0.325) ; v1(9.986,12.639) 9.993,12.645 9.993,14.128 C17.1 ; C4.2 20.623,20.932 20.93,20.625 21.7,20.625 21.848,20.477 U1.1 ; v1(22.386,28.575) C1.2 ; v1(24.291,-4.445) C6.2 25.561,-4.294 v1(25.561,-2.286) ; v1(24.418,19.431) 24.45,19.399 24.45,18.144 C3.2 ; C2.2 v1(27.974,20.447) ; v1(32.419,29.21) R1.2 ; v1(35.721,23.241) C7.1 C7.1@35.789,24.511 ; C5.2 42.736,-9.249 43.954,-9.249 v1(43.976,-9.271) ; U2.1 44.353,-6.6 v1(44.357,-6.604)
  Bottom Layer w0.254: NT1.1 -10.888,-6.877
  Bottom Layer w0.381: 33.816,30.099 33.846,30.129 CN2.5
  Bottom Layer w0.635: T2.4 T2.3 ; v1(-19.478,-5.649) -10.888,-5.649 -10.888,-6.877 ; T1.4 T1.3 ; v1(32.419,29.21) 32.451,29.242 32.959,29.242 33.816,30.099
  other v1: 34.008,-23.471 -23.715,-23.324 24.799,-23.324 -31.843,-23.197 12.099,-19.895 17.56,-17.863 -24.604,-16.847 -33.494,-16.466 23.402,-14.815 -21.429,-14.434 15.655,-12.783 -29.811,-11.767 12.48,-11.259 -46.702,-9.735 -19.778,-9.608 15.147,-9.608 -1.617,-9.1 -6.062,-8.973 -17.492,-7.068 -4.284,-6.814 -5.935,-4.782 11.972,-4.274 -1.998,-3.893 1.558,-2.115 -15.333,-1.099 22.005,0.933 12.48,2.457 16.036,2.838 2.828,4.489 -42.257,7.41 -2.76,8.807 10.448,8.807 -4.284,12.871 32.673,14.649 1.939,17.951 13.115,18.078 -19.397,18.84 15.782,19.602 -31.716,19.856 -4.284,20.364 21.878,20.447 -0.093,20.999 3.59,22.142 -5.554,23.031 22.894,23.793 6.257,24.428 -6.951,24.936 -2.887,25.444 -41.622,25.571 -30.319,26.333 -27.652,26.333 15.147,26.587 -2.887,28.111 -15.968,28.238 -11.904,28.238 -5.554,28.238 -21.175,28.365 3.59,28.746 26.958,30.27 -2.887,31.921 -31.335,33.318 -37.304,33.826 -27.525,33.953 -42.638,34.08 -21.175,34.334 6.638,34.969 26.323,34.969
IRQ_T: LCD1.18 R30.2 | length 36.5
  Top Layer w0.254: LCD1.18 -40.346,23.907 -39.221,23.907 -35.357,20.043 ccw(c-35.177,20.223) -35.177,19.969 -33.494,19.969 -32.772,19.247 -32.772,10.992 -30.607,8.827 R30.2
NetC1_1: C1.1 CN2.1 FB1.1 | length 7.5
  Top Layer w0.508: C1.1 26.289,28.863 FB1.1 30.167,28.863 v1(30.895,29.591)
  Bottom Layer w0.381: 31.246,30.406 CN2.1
  Bottom Layer w0.508: v1(30.895,29.591) 31.246,29.942 31.246,30.406
NetC4_1: C4.1 D1.C JP1.1 JP2.2 U1.3 | length 15.1
  Top Layer w0.635: U1.3 17.327,18.621 17.327,19.936 18.015,20.625 18.165,20.625 18.473,20.932 C4.1 18.576,21.185 D1.C 18.597,24.003 20.608,24.003 JP1.1@21.878,25.273 ; JP1.1 JP1.1@21.878,25.273 ; JP2.2 21.878,23.241 JP1.1@21.878,25.273
NetC8_2: C8.2 C9.1 R2.2 U3.3 | length 8.6
  Top Layer w0.254: U3.3 -23.844,21.331 -23.404,20.891 C9.1 -23.312,18.995 -23.312,16.618 R2.2 -23.243,16.545 -23.243,14.03 C8.2
NetC9_2: C9.2 C10.1 R5.2 U3.2 | length 8.5
  Top Layer w0.254: C10.1 -25.584,14.03 -25.584,16.549 -25.581,16.552 -25.581,19.06 C9.2 -25.554,20.891 -25.114,21.331 U3.2
NetC13_2: C13.2 C14.1 R11.2 U5.3 | length 10.7
  Top Layer w0.254: R11.2 C14.1 ; C13.2@-9.813,35.082 -9.813,33.421 -9.618,33.226 -9.618,30.195 C14.1 ; U5.3 -9.382,27.016 -9.382,29.587 C14.1
NetC14_2: C14.2 C15.1 R13.2 U5.2 | length 10.8
  Top Layer w0.254: U5.2 -8.076,27.016 -8.076,29.587 C14.2 ; C15.1@-7.518,35.082 -7.518,33.548 -7.84,33.226 -7.84,30.195 C14.2 ; R13.2 C14.2
NetC17_2: C17.2 C18.1 R15.2 U6.3 | length 8.5
  Top Layer w0.254: U6.3 7.291,22.334 7.291,19.636 C18.1 7.741,19.186 7.741,16.68 R15.2 7.787,16.634 7.787,14.196 C17.2
NetC18_2: C18.2 C19.1 R25.2 U6.2 | length 8.5
  Top Layer w0.254: C19.1 5.489,14.196 5.489,16.634 R25.2 5.535,16.68 5.535,19.186 C18.2 5.985,19.636 5.985,22.334 U6.2
NetC23_1: C23.1 U7.20 | length 2.9
  Top Layer w0.508: C23.1 -10.507,-5.072 -9.432,-6.147 U7.20
NetC24_1: C24.1 D10.3 R33.2 U8.3 | length 10.3
  Top Layer w0.254: U8.3 -45.79,25.108 C24.1 -45.872,25.34 -45.051,26.161 D10.3 -45.051,27.698 -42.86,29.889 R33.2
NetC26_1: C26.1 U7.8 X1.1 | length 12.9
  Top Layer w0.254: U7.8@0.502,-3.747 4.886,-3.747 5.529,-3.104 C26.1 6.177,-3.602 6.466,-3.602 6.476,-3.612 8.383,-3.612 9.997,-1.997 X1.1
NetC27_1: C27.1 U7.7 X1.2 | length 13.4
  Top Layer w0.254: U7.7 4.687,-4.547 5.529,-5.39 C27.1 6.177,-4.892 6.466,-4.892 6.476,-4.882 8.383,-4.882 9.997,-6.496 X1.2
NetCN1_1: CN1.1 D1.A JP1.2 | length 11
  Top Layer w0.635: D1.A 18.814,28.792 20.317,28.792 20.571,28.792 ; JP1.2 21.878,27.484 20.571,28.792 ; CN1.1 20.571,28.792
NetCN4_1: CN4.1 R33.1 | length 3.4
  Top Layer w0.254: CN4.1 -39.892,32.985 -39.892,30.352 R33.1
NetCN5_1: CN5.1 R13.1 | length 4.1
  Top Layer w0.254: CN5.1 -5.617,32.542 -3.234,30.159 R13.1
NetCN5_2: CN5.2 R11.1 | length 4.1
  Top Layer w0.254: R11.1 -14.224,30.159 -11.841,32.542 CN5.2
NetJ1_1: J1.1 R2.1 | length 3.6
  Top Layer w0.254: J1.1 -21.179,16.585 R2.1
NetJ1_2: J1.2 R5.1 | length 3.6
  Top Layer w0.254: J1.2 -27.779,16.64 R5.1
NetJ3_1: J3.1 R15.1 | length 3.5
  Top Layer w0.254: R15.1 9.938,16.765 J3.1
NetJ3_2: J3.2 R25.1 | length 3.5
  Top Layer w0.254: J3.2 3.338,16.765 R25.1
NetLCD1_9: LCD1.9 R37.2 | length 12
  Top Layer w0.254: LCD1.9@-40.352,11.213 -38.447,13.118 -38.447,15.658 -36.542,17.563 -36.317,17.563 -33.822,15.068 R37.2 R37.2@-33.822,14.768
NetLCD1_12: LCD1.12 R38.2 | length 36.4
  Top Layer w0.254: R38.2 -1.907,5.555 -0.193,7.269 25.046,7.269 26.45,8.673 LCD1.12@33.054,8.673
NetLCD1_17: LCD1.17 R39.2 | length 8.1
  Top Layer w0.254: LCD1.17 -37.837,21.373 -35.089,18.626 -34.295,18.626 -33.822,18.153 R39.2 R39.2@-33.822,17.943
NetLD1_2: LD1.2 R16.2 TP1.1 | length 5.5
  Top Layer w0.254: TP1.1 R16.2
  Bottom Layer w0.254: TP1.1 LD1.2
NetLD2_2: LD2.2 R17.2 TP2.1 | length 5.5
  Top Layer w0.254: TP2.1 R17.2
  Bottom Layer w0.254: TP2.1 LD2.2
NetLD3_2: LD3.2 R23.2 TP3.1 | length 5.5
  Top Layer w0.254: TP3.1 R23.2
  Bottom Layer w0.254: TP3.1 LD3.2
NetLD4_2: LD4.2 R22.2 TP4.1 | length 5.5
  Top Layer w0.254: TP4.1 R22.2
  Bottom Layer w0.254: TP4.1 LD4.2
NetLD5_2: LD5.2 R18.2 TP5.1 | length 5.5
  Top Layer w0.254: TP5.1 R18.2
  Bottom Layer w0.254: TP5.1 LD5.2
NetLD6_2: LD6.2 R21.2 TP6.1 | length 5.5
  Top Layer w0.254: TP6.1 R21.2
  Bottom Layer w0.254: TP6.1 LD6.2
NetLD7_2: LD7.2 R20.2 TP7.1 | length 5.5
  Top Layer w0.254: TP7.1 R20.2
  Bottom Layer w0.254: TP7.1 LD7.2
NetLD8_2: LD8.2 R19.2 TP8.1 | length 5.5
  Top Layer w0.254: TP8.1 R19.2
  Bottom Layer w0.254: TP8.1 LD8.2
NetQ1_2: Q1.2 R14.1 | length 2.5
  Top Layer w0.254: R14.1 -44.162,5.618 -43.72,6.06 Q1.2
NetR3_1: R3.1 U3.5 U5.5 U6.5 | length 46
  Top Layer w0.254: U3.5 -19.3,27.252 -14.146,22.098 U5.5 ; R3.1 -11.754,19.084 -11.281,19.557 -11.281,19.707 -10.634,20.354 U5.5 ; U6.5 8.543,31.242 7.527,32.258 5.592,32.258 -2.551,24.115 -9.517,24.115 -10.634,22.998 U5.5
NetR4_1: R4.1 U3.7 | length 11.4
  Top Layer w0.254: U3.7 -25.114,26.352 -24.131,25.369 -23.654,25.369 -18.311,20.026 -18.311,19.557 -18.092,19.338 R4.1@-17.746,19.338
NetR6_1: R6.1 U3.6 | length 13.1
  Top Layer w0.254: U3.6 -23.844,26.352 -23.369,25.877 -20.553,23.061 -18.4,23.061 -15.479,20.14 -15.479,19.557 -15.006,19.084 R6.1
NetR7_1: R7.1 U5.6 | length 3.3
  Top Layer w0.254: U5.6 -9.364,21.319 -9.158,21.113 -9.086,21.113 -8.856,20.883 R7.1
NetR8_1: R8.1 U6.6 | length 11.6
  Top Layer w0.254: R8.1@0.342,19.211 0.815,19.684 0.815,20.485 5.668,25.339 6.811,25.339 7.273,25.8 U6.6
NetR12_1: R12.1 U5.7 | length 4.5
  Top Layer w0.254: U5.7 -8.065,22.069 -8.065,20.448 -7.174,19.557 -6.281,19.557 R12.1
NetR24_1: R24.1 U6.7 | length 13.1
  Top Layer w0.254: R24.1 -2.76,19.969 0.302,23.031 2.598,23.031 6.003,26.435 U6.7
NetR31_1: R31.1 T1.1 T1.2 | length 19
  Top Layer w0.254: R31.1 24.228,-19.152 v1(24.988,-18.392)
  Bottom Layer w0.635: T1.2 T1.1
NetR32_2: R32.2 T2.1 T2.2 | length 15.1
  Top Layer w0.254: v1(-25.493,-19.133) -21.361,-19.133 R32.2
  Bottom Layer w0.254: T2.1 -26.234,-18.392 v1(-25.493,-19.133)
  Bottom Layer w0.635: T2.2 T2.1
NetR34_1: R34.1 R35.2 U8.1 | length 11.9
  Top Layer w0.254: U8.1 -44.088,21.963 -44.088,21.127 -44.797,20.418 -44.797,18.389 -43.62,17.212 R35.2 -43.62,16.912 -44.67,15.862 -44.67,13.182 -43.62,12.132 R34.1
NetR35_1: R35.1 R36.2 U8.4 | length 5.2
  Top Layer w0.254: U8.4 -45.79,14.592 R36.2
PB0_DC_LCD: LCD1.5 U7.12 | length 46.8
  Top Layer w0.254: LCD1.5@-40.352,1.053 -40.162,1.243 -40.162,2.184 -37.939,4.407 -37.939,6.006 -36.542,7.403 -36.227,7.403 -35.585,6.761 -20.144,6.761 -14.348,0.964 v1(-11.375,0.964) ; U7.12 -3.673,-2.342 v1(-3.673,0.964)
  Bottom Layer w0.254: v1(-11.375,0.964) v1(-3.673,0.964)
PB1_IRQ_T: R30.1 U7.13 | length 18.5
  Top Layer w0.254: R30.1@-14.952,7.064 -14.952,5.206 -12.479,2.733 v1(-11.375,2.733) ; U7.13 v1(-4.479,2.733)
  Bottom Layer w0.254: v1@-11.439,2.742 -11.384,2.742 v1(-11.375,2.733) v1(-4.479,2.733)
PB2_CS_LCD: LCD1.3 U7.14 | length 44.9
  Top Layer w0.254: LCD1.3@-40.352,-4.027 -37.673,-1.348 -37.673,0.251 -36.732,1.192 -36.732,2.133 -36.542,2.323 -33.12,5.745 -20.565,5.745 -14.006,-0.814 v1(-11.365,-0.814) ; U7.14 -5.269,-2.338 v1(-5.269,-0.814)
  Bottom Layer w0.254: v1(-11.365,-0.814) v1(-5.269,-0.814)
PB3_MOSI: K5.4 LCD1.6 LCD1.11 LCD1.16 U7.15 | length 111.3
  Top Layer w0.254: v1(-41.622,9.95) -41.622,17.563 LCD1.16 ; LCD1.6@-40.352,3.593 -38.447,5.498 -38.447,8.038 -36.542,9.943 -33.868,7.269 -19.934,7.269 -14.518,1.853 v1(-12,1.853) ; U7.15@-6.079,-1.923 v1(-6.079,1.853) -6.079,2.426 -4.883,3.622 -0.745,3.622 1.886,6.253 26.33,6.253 26.45,6.133 33.054,6.133 41.346,6.133 K5.4@42.539,7.326
  Bottom Layer w0.254: v1(-41.622,9.95) -41.618,9.947 -36.546,9.947 LCD1.6@-36.542,9.943 ; v1(-12,1.853) v1(-6.079,1.853)
PB4_MISO: JP4.1 JP4.2 K5.1 R4.2 R12.2 R24.2 R37.1 R38.1 R39.1 U7.16 | length 106.8
  Top Layer w0.254: R39.1 R37.1 -31.249,14.445 -31.249,14.295 -29.303,12.349 -19.143,12.349 -17.746,13.746 R4.2 -17.746,17.238 -17.596,17.238 -17.123,17.711 ; R4.2@-17.123,17.457 -17.123,17.607 -16.696,18.034 -6.858,18.034 -6.431,17.607 -6.431,17.457 -5.958,16.984 R12.2 ; U7.16 -6.879,1.294 -6.879,4.335 -5.808,5.405 ; v1(-5.808,6.996) -5.808,5.405 ; v1(-5.808,9.339) JP4.2 JP4.1 R12.2 ; R24.2 R12.2 ; K5.1 37.421,7.542 26.037,7.542 25.256,6.761 1.675,6.761 -0.956,4.13 -2.881,4.13 -4.007,5.255 R38.1 -5.808,5.405
  Bottom Layer w0.254: v1(-5.808,6.996) v1(-5.808,9.339)
PB5_SCK: JP3.1 JP3.2 K5.3 LCD1.7 LCD1.13 LCD1.14 R3.2 U7.17 | length 119.7
  Top Layer w0.254: LCD1.7@-40.352,6.133 -40.162,6.323 -40.162,7.264 -37.939,9.487 -37.939,11.086 -36.542,12.483 -31.836,7.777 -10.134,7.777 ; R3.2 JP3.1 JP3.2 -10.134,9.914 -10.134,7.777 ; U7.17 -8.261,-3.729 -8.261,-2.253 -7.499,-1.491 -7.499,3.729 -7.499,7.777 ; K5.3@39.379,7.772 K5.3@39.745,7.772 ; K5.3 41.182,8.763 41.182,10.795 40.764,11.213 33.054,11.213 26.45,11.213 23.014,7.777 -7.499,7.777 ; -10.134,7.777 -7.499,7.777
  Bottom Layer w0.254: LCD1.14 -37.812,13.753 LCD1.7@-36.542,12.483
PC0_AIN0: C25.1 R20.1 R34.2 U7.23 | length 66.9
  Top Layer w0.254: R34.2 -45.72,9.662 -46.321,9.061 -46.321,-5.715 -33.941,-18.095 -14.28,-18.095 -13.237,-17.052 R20.1 -13.026,-16.991 -13.026,-14.158 -10.448,-11.581 C25.1 ; C25.1@-9.95,-9.999 -9.95,-9.543 -9.103,-8.696 -9.06,-8.696 -8.911,-8.547 U7.23
PC1_AIN1_CS_SD: LCD1.10 R21.1 U7.24 | length 66.1
  Top Layer w0.254: U7.24 -8.63,-9.347 -8.762,-9.479 -8.762,-9.831 -9.277,-10.345 R21.1 -9.208,-17.121 -7.234,-17.121 -6.322,-18.033 15.275,-18.033 16.671,-16.637 16.671,-6.186 26.45,3.593 LCD1.10@33.054,3.593
PC2_CS_MAX1: JP5.1 JP5.2 R6.2 R22.1 U7.25 | length 60.3
  Top Layer w0.254: v1(-18.26,-14.093) -18.26,-14.085 -15.82,-11.644 -15.82,-4.085 -13.893,-2.159 -10.801,-2.159 -9.851,-1.209 -9.851,5.932 v1(-10.915,6.996) ; R6.2 JP5.1 JP5.2 -14.952,11.622 -11.888,8.558 v1(-10.915,8.558) ; v1(-6.951,-13.862) v1@-6.941,-13.853 ; U7.25 -6.933,-10.802 -6.933,-11.559 -6.951,-11.577 -6.951,-13.843 v1@-6.941,-13.853 ; R22.1 -1.807,-17.052 -2.28,-16.579 -2.28,-16.429 -2.7,-16.009 -4.785,-16.009 v1@-6.941,-13.853
  Bottom Layer w0.254: v1(-18.26,-14.093) -18.112,-14.093 -17.881,-13.862 v1(-6.951,-13.862) ; v1(-10.915,6.996) v1(-10.915,8.558)
PC3_CS_MAX2: JP6.1 JP6.2 R7.2 R23.1 U7.26 | length 63.8
  Top Layer w0.254: v1(-17.365,-14.649) -17.26,-14.754 -15.312,-12.806 -15.312,-4.296 -13.683,-2.667 -10.59,-2.667 -9.334,-1.41 v1(-9.334,6.996) ; v1(-9.334,8.558) -9.334,8.609 -8.826,9.117 -8.826,11.654 JP6.2 JP6.1 R7.2 ; U7.26 -6.079,-13.572 -4.15,-15.501 ; v1(-5.681,-13.97) -4.15,-15.501 ; R23.1 2.003,-17.052 0.452,-15.501 -4.15,-15.501
  Bottom Layer w0.254: v1(-17.365,-14.649) -6.36,-14.649 v1(-5.681,-13.97) ; v1(-9.334,6.996) v1(-9.334,8.558)
PC4_SDA: K3.3 R26.1 U7.27 | length 79.3
  Top Layer w0.254: v1(-5.279,-12.907) U7.27 ; v1(17.687,-13.335) 17.687,-5.888 25.988,2.413 33.689,2.413 v1(36.61,5.334) ; v1(36.61,14.224) 36.61,18.542 37.316,19.248 40.697,19.248 41.124,19.675 41.124,19.825 41.597,20.298 R26.1 41.897,20.298 43.074,19.121 K3.3@44.414,19.121
  Bottom Layer w0.254: v1(-5.279,-12.907) -4.16,-12.907 -3.671,-13.396 -2.826,-13.396 -2.105,-14.116 16.396,-14.116 17.178,-13.335 v1(17.687,-13.335) ; v1(36.61,5.334) v1(36.61,14.224)
PC5_SCL: K3.2 R27.1 U7.28 | length 81.7
  Top Layer w0.254: v1(-4.517,-13.796) -4.498,-13.777 -4.498,-10.766 U7.28 ; v1(18.703,-14.097) 18.703,-5.591 26.199,1.905 34.451,1.905 v1(35.467,2.921) ; v1(35.467,14.224) 35.467,18.796 36.969,20.298 R27.1 ; R27.1@39.144,20.294 39.353,20.294 40.72,21.661 K3.2@44.414,21.661
  Bottom Layer w0.254: v1(-4.517,-13.796) -4.412,-13.901 -4.098,-13.901 -4.095,-13.904 -3.036,-13.904 -2.315,-14.624 16.607,-14.624 17.106,-14.126 18.674,-14.126 v1(18.703,-14.097) ; v1(35.467,2.921) v1(35.467,14.224)
PD0_uC_RX: R10.1 U7.30 | length 32.7
  Top Layer w0.254: R10.1 -30.169,-6.975 -29.696,-7.448 -29.696,-7.598 -25.168,-12.126 v1(-19.391,-12.126) ; U7.30 -2.872,-10.754 -2.872,-12.607 v1(-2.866,-12.613)
  Bottom Layer w0.254: v1(-19.391,-12.126) -19.12,-12.126 -17.962,-13.285 -7.478,-13.285 -7.274,-13.081 -6.702,-13.081 -5.747,-12.126 -3.353,-12.126 v1(-2.866,-12.613)
PD1_uC_TX: R9.1 U7.31 | length 31.2
  Top Layer w0.254: R9.1 -27.629,-6.975 -23.367,-11.237 v1(-20.265,-11.237) ; U7.31@-2.085,-10.753 U7.31 -2.079,-12.024 -1.723,-12.38 v1(-1.723,-12.507)
  Bottom Layer w0.254: v1(-20.265,-11.237) -19.175,-11.237 -18.095,-12.317 -18.095,-12.319 -17.638,-12.777 -7.689,-12.777 -7.485,-12.573 -6.912,-12.573 -5.957,-11.618 -2.739,-11.618 -1.85,-12.507 v1(-1.723,-12.507)
PD2_BTN_A: R32.1 U7.32 | length 26.7
  Top Layer w0.254: R32.1 -21.192,-17.052 -20.159,-16.02 -20.159,-14.84 v1(-17.314,-11.996) ; U7.32 -1.279,-11.301 -0.58,-12 v1(-0.58,-12.507)
  Bottom Layer w0.254: v1(-17.314,-11.996) -16.628,-11.996 -16.39,-12.233 -7.864,-12.233 -7.695,-12.065 -7.122,-12.065 -6.168,-11.11 -1.977,-11.11 v1(-0.58,-12.507)
PD3_CS_T: R28.1 U7.1 | length 39.2
  Top Layer w0.254: R28.1 -32.709,-6.975 -26.774,-12.91 -19.049,-12.91 -18.102,-11.963 v1(-18.102,-11.132) ; v1(-0.144,-11.081) -0.144,-10.933 0.121,-10.668 U7.1
  Bottom Layer w0.254: v1(-18.102,-11.132) -16.603,-11.132 -16.009,-11.725 -8.074,-11.725 -7.906,-11.557 -7.333,-11.557 -6.378,-10.602 -0.623,-10.602 v1(-0.144,-11.081)
PD4: R16.1 U7.2 | length 13.7
  Top Layer w0.254: U7.2 0.176,-8.602 1.072,-8.602 1.316,-8.846 1.316,-9.114 1.327,-9.125 1.327,-9.67 8.71,-17.052 R16.1
PD5_ONE_WIRE: K4.1 K6.1 K7.1 K8.1 R29.1 U7.9 | length 74.6
  Top Layer w0.254: U7.9 -1.279,2.37 2.096,5.745 24.261,5.745 25.18,4.826 v1(34.324,4.826) ; v1(34.324,14.224) 34.324,19.084 39.001,23.761 39.151,23.761 39.624,24.234 R29.1 39.404,24.604 K7.1 K8.1 K6.1 K4.1
  Bottom Layer w0.254: v1(34.324,4.826) v1(34.324,14.224)
PD6_BACKLIGHT: Q1.1 U7.10 | length 80.7
  Top Layer w0.254: Q1.1 -45.62,-5.697 -40.947,-10.37 -39.844,-10.37 -35.399,-5.925 -26.636,-5.925 -25.798,-6.763 -25.798,-6.766 -22.004,-10.56 -20.692,-10.56 -20.588,-10.456 -18.931,-10.456 -16.328,-7.853 -16.328,-3.875 -14.104,-1.651 -11.011,-1.651 -10.359,-0.998 -10.359,2.972 -11.008,3.622 v1(-12,3.622) ; U7.10 v1(-2.079,2.841)
  Bottom Layer w0.254: v1(-12,3.622) -2.86,3.622 v1(-2.079,2.841)
PD7_RST_LCD: LCD1.4 U7.11 | length 47.1
  Top Layer w0.254: LCD1.4@-40.352,-1.487 -38.447,0.418 -38.447,2.958 -36.542,4.863 -35.152,6.253 -20.355,6.253 -14.177,0.075 v1(-12,0.075) ; U7.11 v1(-2.879,0.075)
  Bottom Layer w0.254: v1(-12,0.075) v1(-2.879,0.075)
PE0_BTN_B: R31.2 U7.3 | length 18.3
  Top Layer w0.254: U7.3 1.094,-7.747 1.824,-8.477 1.824,-8.904 1.835,-8.915 1.835,-9.123 8.079,-15.367 12.383,-15.367 14.068,-17.052 R31.2
PE1_LED1: R17.1 U7.6 | length 17.9
  Top Layer w0.254: v1(-2.206,-7.241) -2.206,-5.961 -1.592,-5.347 U7.6 U7.6@0.073,-5.395 ; v1(2.015,-11.462) 2.015,-13.254 5.813,-17.052 R17.1
  Bottom Layer w0.254: v1(-2.206,-7.241) -1.059,-7.241 2.015,-10.315 v1(2.015,-11.462)
PE2_LED2: R18.1 U7.19 | length 15
  Top Layer w0.254: v1(-8.323,-10.573) -8.323,-14.346 -5.617,-17.052 R18.1 ; U7.19 -8.257,-5.368 v1(-6.873,-5.368)
  Bottom Layer w0.254: v1(-8.323,-10.573) -6.873,-9.123 v1(-6.873,-5.368)
PE3_CS_MAX3: JP7.1 JP7.2 R8.2 R19.1 U7.22 | length 53.8
  Top Layer w0.254: R19.1 -16.897,-15.892 -13.817,-12.813 -13.817,-11.653 ; v1(-8.28,6.996) -8.28,-1.075 -10.38,-3.175 -13.472,-3.175 -14.804,-4.506 -14.804,-10.666 -13.817,-11.653 ; v1(-8.28,8.558) -4.469,8.558 -2.76,10.267 JP7.2@-2.76,11.049 ; U7.22 -8.911,-7.747 -9.054,-7.89 -9.097,-7.89 -10.434,-9.227 -11.12,-9.227 -11.523,-9.63 -11.523,-11.306 -11.87,-11.653 -13.817,-11.653 ; JP7.2 JP7.1 -2.472,14.224 -0.335,16.361 -0.335,16.511 0.138,16.984 R8.2
  Bottom Layer w0.254: v1(-8.28,6.996) v1(-8.28,8.558)
RESET: K5.5 U7.29 | length 61.7
  Top Layer w0.254: v1(-3.755,-14.685) -3.679,-14.609 U7.29 ; v1(19.636,-14.859) 19.719,-14.776 19.719,-5.293 26.409,1.397 36.356,1.397 K5.5
  Bottom Layer w0.254: v1(-3.755,-14.685) -3.743,-14.673 -3.146,-14.673 -2.687,-15.132 16.817,-15.132 17.237,-14.713 17.922,-14.713 18.087,-14.878 19.617,-14.878 v1(19.636,-14.859)
RTS: K1.1 U4.4 | length 7.7
  Top Layer w0.254: U4.4 -23.606,0.577 -22.851,0.577 -21.556,-0.718 -19.143,-0.718 K1.1
SHIELD: C7.2 CN2.0 R1.1
  other v1: 37.2,27.9
VCC: C5.1 C6.1 C11.1 C12.2 C16.2 C20.2 C21.1 D10.2 FB2.1 K2.3 K3.4 K4.2 K5.2 K6.2 K7.2 K8.2 LCD1.1 R14.2 R26.2 R27.2 R29.2 U2.2 U2.4 U3.4 U4.2 U4.5 U4.6 U5.4 U6.4 U7.4 U8.5 | length 377.3
  Top Layer w0.254: C12.2 -24.183,24.861 -22.574,23.252 U3.4 ; U5.4@-10.84,26.773 -10.634,26.979 U5.4 ; U6.4 8.558,22.337 C20.2 ; R27.2 41.6,18.198 41.983,17.815 43.18,17.815 K3.4@44.414,16.581
  Top Layer w0.508: U7.4 1.657,-6.947 2.459,-7.749 2.459,-7.899 2.83,-8.27 C21.1
  Top Layer w0.635: v1(-46.983,21.236) -46.983,21.281 -47.083,21.381 -47.083,29.001 -46.001,30.083 D10.2 -46.001,30.413 -47.083,31.495 -47.083,34.447 -46.194,35.336 -28.832,35.336 ; R14.2 -44.162,-5.297 -40.352,-9.107 -36.542,-5.297 LCD1.1@-36.542,-2.757 ; U8.5 -43.89,19.566 -43.883,19.558 v1(-42.892,19.558) ; C12.2 -28.795,35.299 -28.832,35.336 ; U4.6 U4.5 ; K2.3 -24.199,-3.282 C11.1 -24.199,-6.296 -21.461,-9.034 -21.461,-9.747 v1(-21.429,-9.779) ; U5.4@-10.84,26.773 -11.65,26.773 C16.2 -16.549,26.773 -25.112,35.336 -28.832,35.336 ; v1(-5.427,26.827) -1.363,26.827 4.987,33.177 8.543,33.177 12.353,29.367 12.353,23.584 C20.2@11.106,22.337 ; FB2.1 2.1,1.431 5.555,4.886 v1(15.02,4.886) 20.802,4.886 v1(23.72,1.968) ; C21.1 3.242,-8.531 3.242,-9.431 7.102,-13.291 12.838,-13.291 15.358,-10.77 ; C20.2 C20.2@11.106,22.337 ; v1(11.972,8.793) 11.972,21.471 C20.2@11.106,22.337 ; v1(17.56,-15.494) 18.195,-16.129 20.1,-16.129 20.608,-15.621 v1(20.608,-10.795) 24.672,-6.731 26.426,-6.731 27.604,-5.552 28.229,-5.552 28.712,-5.07 C6.1 28.712,-3.82 25.902,-1.01 v1(25.902,-0.214) ; U2.4 v1@39.658,-4.3 ; 39.658,-0.635 42.825,-0.635 44.103,0.643 44.103,8.382 42.945,9.54 42.945,9.906 K5.2@42.539,10.312 ; v1(41.69,22.479) 41.69,22.524 41.724,22.558 R29.2 41.944,24.604 K7.2 K4.2 ; v1@39.658,-4.3 U2.2 ; v1@39.658,-4.3 38.388,-4.3 U2.2 ; v1@39.658,-4.3 U2.2 ; v1@39.658,-4.3 U2.2
  Bottom Layer w0.635: v1(-46.983,21.236) -45.305,19.558 v1(-42.892,19.558) ; LCD1.1@-36.542,-2.757 -35.108,-4.191 -27.188,-4.191 K2.3 ; U4.6 -25.239,-0.33 K2.3 ; v1(-21.429,-9.779) -21.429,-12.319 -17.917,-15.831 17.178,-15.831 17.515,-15.494 v1(17.56,-15.494) ; U4.2 -23.165,-0.795 -23.793,-0.795 K2.3 ; v1(-11.65,26.827) v1(-5.427,26.827) ; v1(11.972,8.793) 11.972,7.934 v1(15.02,4.886) ; v1(15.89,-10.795) v1(20.608,-10.795) ; v1(23.72,1.968) v1(25.902,-0.214) ; v1(41.69,22.479) 41.69,19.431 K3.4 42.579,14.732 K5.2
  other v1: 33.816,-8.001 35.086,-8.001 36.356,-8.001 37.626,-8.001 38.896,-8.001 33.308,-6.985 34.578,-6.985 35.848,-6.985 37.118,-6.985 38.388,-6.985 39.658,-6.985 33.308,-5.715 34.578,-5.715 38.388,-5.715 39.658,-5.715 33.308,-4.445 34.578,-4.445 38.388,-4.445 39.658,-4.445 33.308,-3.175 34.578,-3.175 38.388,-3.175 39.658,-3.175 33.308,-1.905 34.578,-1.905 35.848,-1.905 37.118,-1.905 38.388,-1.905 39.658,-1.905 33.816,-0.889 35.086,-0.889 36.356,-0.889 37.626,-0.889 38.896,-0.889
pads on no net: CN2.2 CN2.3 CN2.4 J1.0 J3.0 K2.2 LCD1.0 U3.8 U5.8 U6.8

## Polygon pours and split planes (outlines as drawn)
GND on Bottom Layer "USB-TOP" (solid, remove dead copper, pour order 9): -48.099,-24.721 -48.099,36.322 46.008,36.322 46.008,-24.721
SHIELD on Bottom Layer "USB-BOT" (solid, pour order 7): 27.339,36.322 27.339,31.496 28.482,30.353 34.451,30.353 34.705,30.099 34.705,26.035 35.086,25.654 36.737,25.654 37.753,26.67 37.753,36.322